# Altium PCB RPIDCA.PcbDoc
Units mil, origin at the board's own origin, x right, y up, seen from the top; angles counter-clockwise.
Board outline 2362.2 x 905.51 mil, 2 copper layers (Top Layer, Bottom Layer); 27 components, 26 nets, 110 pads, 20 vias.
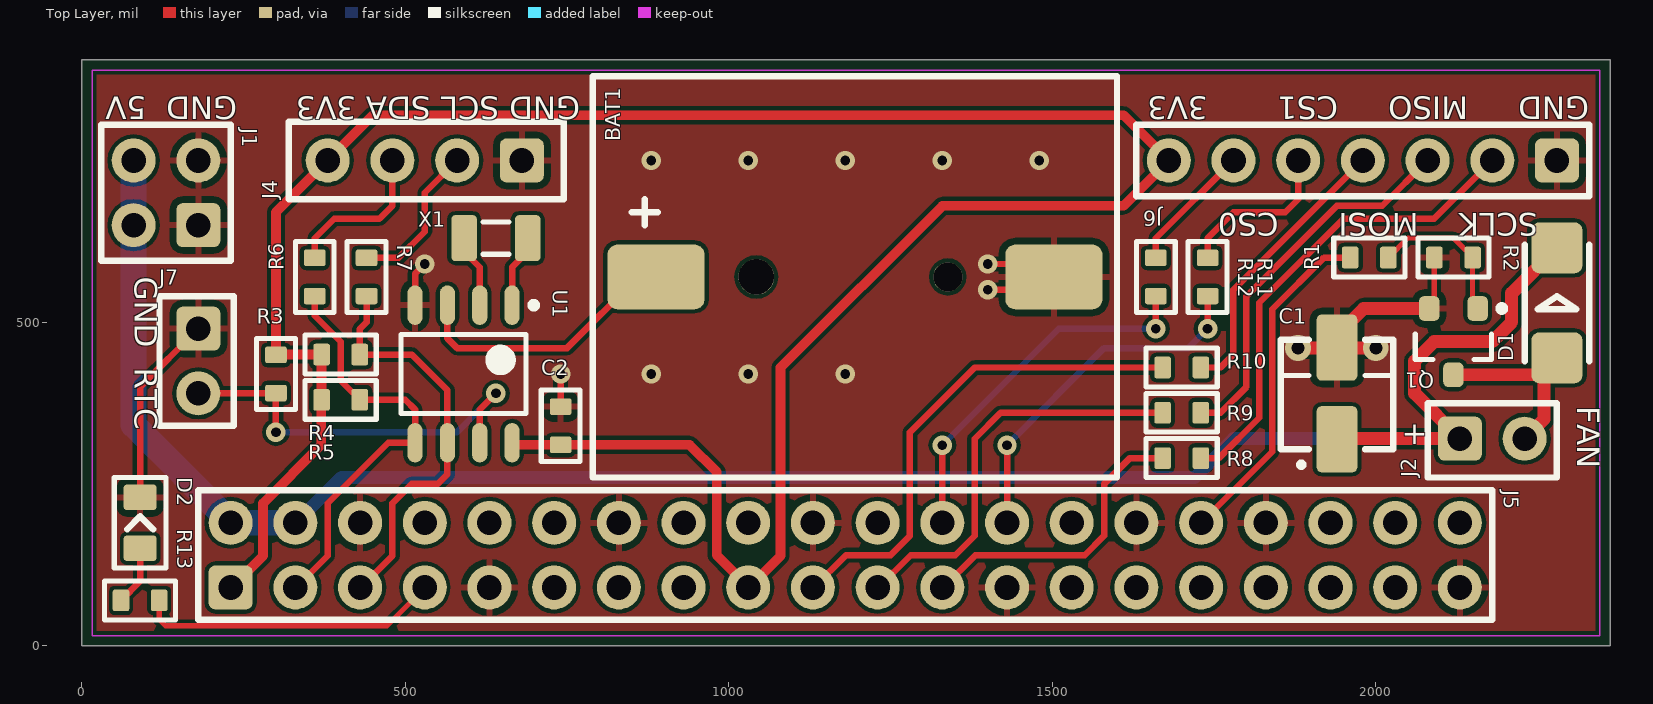
[diagram p0: Top Layer view]
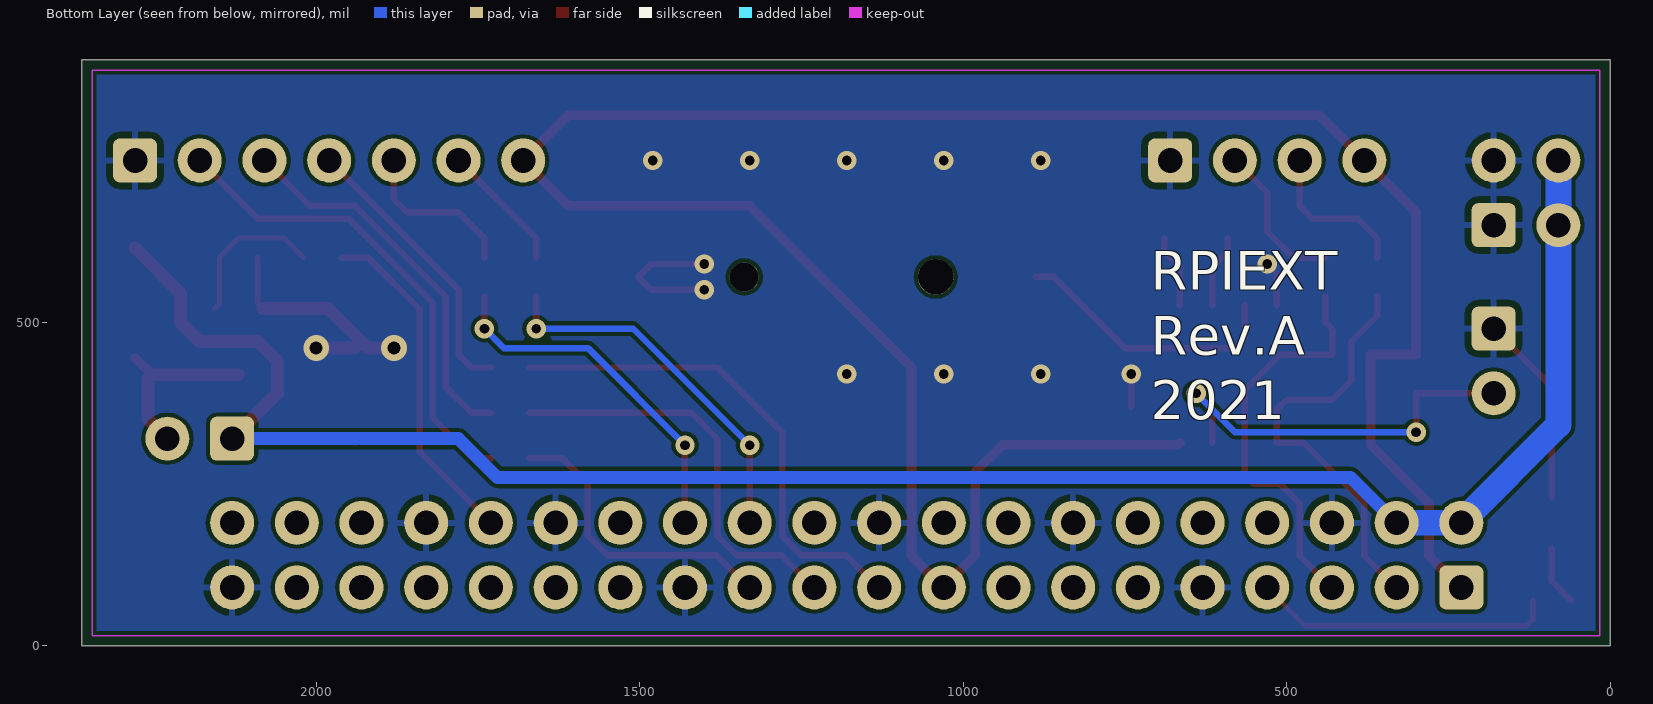
[diagram p1: Bottom Layer view, seen from below]
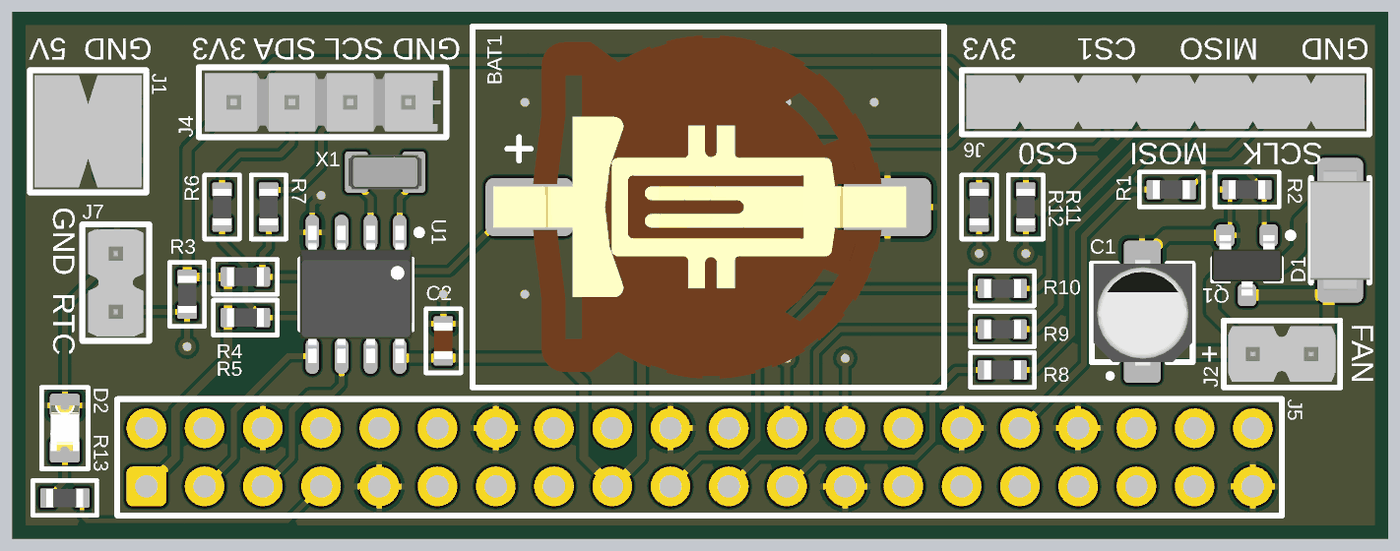
[diagram p2: 3D render of the assembled board from above, using the file's embedded part models]

## Layer stack, top to bottom
Top Solder: solder mask 0.4, Solder Resist, Dk 3.5
Top Layer: signal copper 1.4
Dielectric 1: dielectric 12.6, FR-4, Dk 4.8
Bottom Layer: signal copper 1.4
Bottom Solder: solder mask 0.4, Solder Resist, Dk 3.5

## Board outline
0,0 2362.2,0 2362.2,905.51 0,905.51

## Design rules (kind name [scope] priority, off if disabled: settings)
Clearance [All] p1: gap=6 ignorepadtopadclearanceinfootprint=FALSE
ComponentClearance [All] p1: gap=10 collisioncheckmode=3 verticalgap=10 showdistances=TRUE
HoleSize [All] p1: absolutevalues=TRUE maxlimit=100 minlimit=15 maxpercent=80.000 minpercent=20.000
PolygonConnect [All] p1: thpad.connectstyle=Relief thpad.reliefconductorwidth=10 thpad.reliefentries=4 thpad.polygonreliefangle="90 Angle" thpad.airgapwidth=10 smdpad.connectstyle=Relief smdpad.reliefconductorwidth=10 smdpad.reliefentries=4 smdpad.polygonreliefangle="90 Angle" smdpad.airgapwidth=10 via.connectstyle=Direct via.reliefconductorwidth=10 via.reliefentries=4 via.polygonreliefangle="90 Angle" via.airgapwidth=10
RoutingVias [All] p1: holewidth=15 width=50 viastyle="Through Hole" minholewidth=15 minwidth=50 maxholewidth=15 maxwidth=50
SolderMaskExpansion [All] p1: expansion=4
Width [All] p1: maxlimit=50 minlimit=6 preferedwidth=10
28 further rules are at their usual default settings.

## Components (designator, comment, footprint, x,y, rotation, side; value= is the part's Value field where it differs from the comment)
BAT1 "CR1220" BC501SM 1200,570 r180 top
C1 "10uF" C_EL_B_4MM_RF_M 1940,390 r90 top
C2 "0.1uF" 0603C_RF_M 740,340 r270 top
D1 "D" ONSEMI_DO214AC_RF_M 2280,530 r270 top
D2 "Unspecified" 0805LED_RF_M 90,190 r270 top
J1 "DCIN" HEADER-2.54-4P-2R 180,650 r180 top
J2 "FAN" HEADER-2.54-2P1 2130,320 r0 top
J4 "I2C" HEADER-2.54-4P1 680,750 r180 top
J5 "RPI4-40P" HEADER-2.54-RCPT-40P-2R-BTL 230,90 r0 top
J6 "PINHDR-7P1" HEADER-2.54-7P1 2280,750 r180 top
J7 "RTCINT" HEADER-2.54-2P1 180,490 r270 top
Q1 "IRLML2502" IRLML_SOT-23 2120,470 r270 top
R1 "1K" 0603R_RF_M 1990,600 r0 top
R2 "33K" 0603R_RF_M 2120,600 r180 top
R3 "10K" 0603R_RF_M 300,420 r90 top
R4 "10K" 0603R_RF_M 400,450 r180 top
R5 "10K" 0603R_RF_M 400,380 r180 top
R6 "100R" 0603R_RF_M 360,570 r270 top
R7 "100R" 0603R_RF_M 440,570 r270 top
R8 "100R" 0603R_RF_M 1700,290 r180 top
R9 "100R" 0603R_RF_M 1700,360 r180 top
R10 "100R" 0603R_RF_M 1700,430 r180 top
R11 "100R" 0603R_RF_M 1740,570 r270 top
R12 "100R" 0603R_RF_M 1660,570 r270 top
R13 "1K" 0603R_RF_M 90,70 r180 top
U1 "M41T81SM6F" ST_SOIC-8 590,420 r270 top
X1 "32.786 kHz" XTAL_3215 640,630 r180 top

## Footprints (in the part's own frame and the unit in brackets; to place one, negate y for a bottom-side part, rotate by r counter-clockwise, add the part's x,y. Pads: shape width x height; smd on the part's side, far side on the other; paste and mask are expansions set on the pad)
0603C_RF_M [mm] "Chip Capacitor 0603 Reflow Medium"
  rrect25% 0.65x0.85 smd: 1(-0.75,0) 2(0.75,0)
  silkscreen extent -1.4,-0.76 1.4,0.76, body extent -0.8,-0.4 0.8,0.41, height 0.9
0603R_RF_M [mm] "Chip Resistor 0603 Reflow Medium"
  rrect25% 0.65x0.85 smd: 1(-0.75,0) 2(0.75,0)
  silkscreen extent -1.4,-0.76 1.4,0.76, body extent -0.8,-0.4 0.8,0.4, height 0.55
0805LED_RF_M [mm] "Chip LED 0805 Reflow Medium"
  rrect25% 1x1.3 smd: A(1,0) C(-1,0)
  silkscreen extent -1.78,-1.02 1.78,1.02, body extent -1,-0.62 1,0.63, height 0.7
BC501SM [mil] "BATTERY HOLDER COIN 12MM SMD"
  round 45 hole 45 unplated mask-50: M1(-138.49,0.01)
  round 55 hole 55 unplated mask-60: M2(157.51,0.01)
  rrect30% 150x100 smd: N(-302.49,0.01) P(312.51,0.01)
  silkscreen extent -400,-310 410,310, body extent -335,-295 374,295, height 162
C_EL_B_4MM_RF_M [mm] "Electrolytic Capacitor SMD Size B 4mm OD"
  rrect25% 2.6x1.6 smd: N(1.8,0) P(-1.8,0)
  silkscreen extent -2.88,-2.2 2.1,2.2, body extent -2.35,-2.17 2.25,2.13, height 3.91
HEADER-2.54-2P1 [mil] "Pin Header Single Row 2 Positions Pitch 2.54 mm"
  rrect30% 68x68 hole 38: 1(0,0)
  round 68 hole 38: 2(100,0)
  silkscreen extent -50,-60 150,55, body extent -42,-50 142,45, height 331
HEADER-2.54-4P1 [mil] "Pin Header Single Row 4 Positions Pitch 2.54 mm"
  rrect30% 68x68 hole 38: 1(0,0)
  round 68 hole 38: 2(100,0) 3(200,0) 4(300,0)
  silkscreen extent -65,-60 360,60, body extent -55,-50 350,50, height 332
HEADER-2.54-4P-2R [mil] "Rectangular Header Male Pins Double Row 4 Positions Pitch 2.54 mm"
  rrect30% 68x68 hole 38: 1(0,0)
  round 68 hole 38: 2(100,0) 3(0,-100) 4(100,-100)
  silkscreen extent -50,-155 150,55, body extent -42,-146 142,46, height 322
HEADER-2.54-7P1 [mil] "Pin Header Single Row 7 Positions Pitch 2.54 mm"
  rrect30% 68x68 hole 38: 1(0,0)
  round 68 hole 38: 2(100,0) 3(200,0) 4(300,0) 5(400,0) 6(500,0) 7(600,0)
  silkscreen extent -50,-55 650,55, body extent -42,-46 642,46, height 321
HEADER-2.54-RCPT-40P-2R-BTL [mil] "40 Position Receptacle, Bottom or Top Entry Connector 0.100\" (2.54mm) Through Hole Gold Reverse"
  rrect30% 68x68 hole 38: 1(0,0)
  round 68 hole 38: 2(0,100) 3(100,0) 4(100,100) 5(200,0) 6(200,100) 7(300,0) 8(300,100) 9(400,0) 10(400,100) 11(500,0) 12(500,100) 13(600,0) 14(600,100) 15(700,0) 16(700,100) 17(800,0) 18(800,100) 19(900,0) 20(900,100) 21(1000,0) 22(1000,100) 23(1100,0) 24(1100,100) 25(1200,0) 26(1200,100) 27(1300,0) 28(1300,100) 29(1400,0) 30(1400,100) 31(1500,0) 32(1500,100) 33(1600,0) 34(1600,100) 35(1700,0) 36(1700,100) 37(1800,0) 38(1800,100) 39(1900,0) 40(1900,100)
  silkscreen extent -50,-50 1950,150, body extent -50,-49 1950,149, height 108
IRLML_SOT-23 [mm] "Infineon's IRLML Series Logic-Level Transistor SOT-23"
  rrect50% 0.97x0.8 smd: 1(-1.3,0.95) 2(-1.3,-0.95) 3(1.3,0)
  silkscreen extent -1.42,-1.5 0.7,2.03, body extent -1.32,-1.52 1.32,1.52, height 1.12
ONSEMI_DO214AC_RF_M [mm]
  rrect30% 2x2 smd: A(2.159,0) C(-2.159,0)
  silkscreen extent -2.29,-1.27 2.29,1.27, body extent -2.61,-1.3 2.61,1.3, height 2.3
ST_SOIC-8 [mm]
  oval 1.55x0.6 smd: 1(-2.7,1.905) 2(-2.7,0.635) 3(-2.7,-0.635) 4(-2.7,-1.905) 5(2.7,-1.905) 6(2.7,-0.635) 7(2.7,0.635) 8(2.7,1.905)
  silkscreen extent -2.82,-2.45 1.55,2.88, body extent -3,-2.45 3,2.45, height 1.75
XTAL_3215 [mm] "Crystal SMD 3.2x1.5mm 2-Flat Leads"
  rrect30% 1x1.8 smd: 1(-1.25,0) 2(1.25,0)
  silkscreen extent -0.51,-0.64 0.51,0.64, body extent -1.6,-0.75 1.6,0.75, height 0.9

## Part data
BAT1: library part BC501SM, "Single Cell Battery", Nominal Voltage=3V, Supplier Part No=BC501SM-ND, Mounting Technology=SMT, Suitable Battery=CR1220, Supplier=DigiKey, Supplier Link=https://www.digikey.com/en/products/detail/mpd-memory-protection-devices/BC501SM/2439260
C1: library part C-P, "Polarized Capacitor", Manufacturer="Generic Brand", Max Voltage="? V", Tolerance=?, Category=Capacitor, Mounting Technology=SMT, Supplier Link=http://
C2: library part C, "Capacitor", Manufacturer="Generic Brand", Max Voltage=10V, Tolerance=20%, Category=Capacitor, Mounting Technology=SMT, Supplier Link=http://
D1: "Diode (Rectifier)", Manufacturer="Generic Brand", Max Forward Voltage="? V", Power Rating="? W", Category=Diode, Mounting Technology=SMT, Supplier Link=http://
D2: library part LED, "LED", Forward Voltage Drop="? V", Manufacturer="Generic Brand", Category=Diode, Emitting Color=Unspecified, Mounting Technology=SMT, Supplier Link=http://
J1: library part PINHDR-4P-2R, "Rectangular Header Male Pins Double Row 4 Positions", Mounting Technology=THT
J2 J7: library part PINHDR-2P1, "Pin Header Single Row 2 Positions", Mounting Technology=THT
J4: library part PINHDR-4P1, "Generic Pin Header 4x1"
J5: "Raspberry Pi 4 Model B+ Compatible GPIO Header"
J6: "Pin Header Single Row 7 Positions", Mounting Technology=THT
Q1: "MOSFET N-CH 20V 4.2A SOT23", Alternative Supplier Part No=517112745, Manufacturer=Infineon, Manufacturer Part No=IRLML2502TRPBF, Package=SOT-23, Supplier Part No=IRLML2502TRPBFCT-ND, Alternative Supplier=Chipdip, Alternative Supplier Link=https://www.chipdip.by/product/irlml2502tr, Mounting Technology=SMT, Supplier=DigiKey, Supplier Link=https://www.digikey.com/en/products/detail/infineon-technologies/IRLML2502TRPBF/811439
R1 R2 R3 R4 R5 R6 R7 R8 R9 R10 R11 R12 R13: library part R, "Resistor", Manufacturer="Generic Brand", Max Voltage="? V", Power Rating="? W", Tolerance=?, Category=Resistor, Mounting Technology=SMT, Supplier Link=http://
U1: "IC RTC CLK/CALENDAR I2C 8-SOIC", Alternative Supplier Part No=9000354105, Manufacturer=STMicroelectronics, Package=SOIC-8, Supplier Part No=497-4684-1-ND, Alternative Supplier=Chipdip, Alternative Supplier Link=https://www.chipdip.by/product/m41t81sm6f, Detailed Description="Real Time Clock (RTC) IC Clock/Calendar - I?C, 2-Wire Serial 8-SOIC (0.154\", 3.90mm Width)", Manufacturer Part No=M41T81SM6F, Mounting Technology=SMT, Supplier=DigiKey, Supplier Link=https://www.digikey.com/en/products/detail/stmicroelectronics/M41T81SM6F/865103, VCC="2.7V ~ 5.5V"
X1: library part XT-2P, "Crystal Resonator (2 Leads)", Manufacturer="Generic Brand", Tolerance="? ppm", Category=Crystal, Mounting Technology=SMT, Supplier Link=http://

## Via types
v1: diameter 30, hole 15, Top Layer to Bottom Layer, tented both sides, 18 vias
v2: diameter 40, hole 20, Top Layer to Bottom Layer, tented both sides, 2 vias

## Nets (pads, with @x,y where several pads share a name; then routed paths per layer and width w, separated by ;. In a path a pad name is that pad's centre, name@x,y a point inside that pad or via, vN(x,y) a via of type N, cw(c..) or ccw(c..) an arc to the next point about the centre after c; other vN are vias at no path point)
3V3: C2.2 J4.4 J5.1 J5.17 J6.7 R3.2 R4.2 R5.2 U1.8 | length 3807.7
  Top Layer w15: J5.1@230.55,89.45 280,138.9 280,220 370,310 370,379.53 R5.2 R4.2 R3.2@300,450 ; R3.2 R3.2@300,450 ; U1.8 668.23,310.47 C2.2 939.53,310.47 981.1,268.9 981.1,140 1031.1,90 1080,138.9 1080,430 1330,680 1610,680 J6.7 1610,820 450,820 J4.4 300,670 R3.2@300,450
5V: C1.P D1.C J1.2 J1.4 J2.1 J5.2 J5.4 | length 3234.8
  Top Layer w20: C1.P@1939.13,320 C1.P 1940.87,320 J2.1 2060,390 2060,440 2090,470 2180,470 2210,500 2210,545 D1.C
  Bottom Layer w20: J5.4@331.1,190 401.1,260 1720,260 1780,320 J2.1
  Bottom Layer w40: J1.4 J1.2 80,341.1 231.1,190 J5.4 J5.4@331.1,190
CS0: J5.24 R12.2 | length 575.5
  Top Layer w10: v1(1330,310) 1330,191.1 J5.24@1331.1,190 ; v1(1660,490) R12.2
  Bottom Layer w10: v1(1330,310) 1510,490 v1(1660,490)
CS1: J5.26 R11.2 | length 555.5
  Top Layer w10: v1(1430,310) 1430,191.1 J5.26@1431.1,190 ; v1(1740,490) R11.2
  Bottom Layer w10: v1(1430,310) 1580,460 1710,460 v1(1740,490)
FAN_EN: J5.32 R1.1 | length 529.2
  Top Layer w10: J5.32 1840,300 1840,520 1920,600 R1.1
GND: BAT1.N C1.N C2.1 D2.C J1.1 J1.3 J4.1 J5.6 J5.9 J5.14 J5.20 J5.25 J5.30 J5.34 J5.39 J6.1 J7.1 Q1.2 R2.2 U1.4 | length 1009.9
  Top Layer w8: Q1.2 2090.47,529.05 R2.2
  Top Layer w10: D2.C 90,400 J7.1 ; U1.4 515,575 v1(530,590) ; C2.1 v1(740,420) ; v1(1400,550) 1482.5,550 BAT1.N 1482.47,590 v1(1400,590)
  Top Layer w20: v2(1880,460) 1920,460 1981.18,521.18 Q1.2 ; C1.N@1940,460 v2(2000,460)
  other v1: 880,420 1030,420 1180,420 880,750 1030,750 1180,750 1330,750 1480,750
LED: J5.7 R13.1 | length 468.9
  Top Layer w8: R13.1 119.53,40.47 129.25,30.75 471.85,30.75 J5.7@530.55,89.45
MISO: J5.21 R9.2 | length 639.9
  Top Layer w10: J5.21@1230.55,89.45 1281.1,140 1350,140 1380,170 1380,320 1420,360 R9.2
MOSI: J5.19 R10.2 | length 774.7
  Top Layer w10: J5.19@1130.55,89.45 1181.1,140 1250,140 1280,170 1280,330 1380,430 R10.2
NetBAT1_P: BAT1.P U1.3 | length 425.6
  Top Layer w10: U1.3 565,475 580,460 750,460 859.99,569.99 BAT1.P
NetD1_A: D1.A J2.2 Q1.3 | length 284.7
  Top Layer w15: D1.A@2253.82,418.82 D1.A
  Top Layer w20: Q1.3 2253.82,418.82 2260,412.64 2260,350 J2.2
NetD2_A: D2.A R13.2 | length 92.9
  Top Layer w10: R13.2 90,99.53 D2.A
NetJ4_2: J4.2 R7.1 | length 237.5
  Top Layer w10: R7.1 489.53,599.53 530,640 530,700 J4.2
NetJ4_3: J4.3 R6.1 | length 241.2
  Top Layer w10: R6.1 360,630 390,660 460,660 480,680 J4.3
NetJ6_2: J6.2 R8.1 | length 745
  Top Layer w10: R8.1 1757.57,290 1820,352.43 1820,530 1950,660 2090,660 J6.2
NetJ6_3: J6.3 R9.1 | length 594
  Top Layer w10: R9.1 1760,360 1800,400 1800,540 1940,680 2010,680 J6.3
NetJ6_4: J6.4 R10.1 | length 441.6
  Top Layer w10: R10.1 1760,430 1780,450 1780,550 J6.4
NetJ6_5: J6.5 R11.1 | length 255.3
  Top Layer w10: R11.1 1740,630 1780,670 1860,670 1880,690 J6.5
NetJ6_6: J6.6 R12.1 | length 200.2
  Top Layer w10: R12.1 1660,630 J6.6
NetQ1_1: Q1.1 R1.2 R2.1 | length 237.2
  Top Layer w8: R1.2 2049.53,630 2120,630 2149.53,600.47 R2.1 2149.53,529.06 Q1.1
NetU1_1: U1.1 X1.1 | length 113.7
  Top Layer w10: U1.1 665,585 689.21,609.21 X1.1
NetU1_2: U1.2 X1.2 | length 113.7
  Top Layer w10: X1.2 590.79,609.21 615,585 U1.2
RTC_INT: J7.2 R3.1 U1.7 | length 632.2
  Top Layer w10: J7.2 299.53,390 R3.1 v1(300,330) ; U1.7 615,365 v1(640,390)
  Bottom Layer w10: v1(300,330) 580,330 v1(640,390)
SCL: J5.5 R4.1 R7.2 U1.6 | length 637.7
  Top Layer w10: J5.5@430.55,89.45 480,138.9 480,220 510,250 550,250 565,265 U1.6 565,395 510,450 R4.1 429.53,489.53 440,500 R7.2
SCLK: J5.23 R8.2 | length 469.9
  Top Layer w10: J5.23@1330.55,89.45 1381.1,140 1550,140 1580,170 1580,250 1620,290 R8.2
SDA: J5.3 R5.1 R6.2 U1.5 | length 657.1
  Top Layer w10: J5.3@330.55,89.45 380,138.9 380,220 473.7,313.7 U1.5 515,365 500,380 R5.1 400,409.53 400,470 360,510 R6.2
pads on no net: BAT1.M1 BAT1.M2 J5.8 J5.10 J5.11 J5.12 J5.13 J5.15 J5.16 J5.18 J5.22 J5.27 J5.28 J5.29 J5.31 J5.33 J5.35 J5.36 J5.37 J5.38 J5.40

## Polygon pours and split planes (outlines as drawn)
GND on Bottom Layer "GND_L02_P000" (solid, remove dead copper, pour order 0): 19.68,885.83 2342.52,885.83 2342.52,19.68 19.68,19.68
GND on Top Layer "Top Layer GND" (solid, remove dead copper, pour order 2): 15.75,889.76 2346.46,889.76 2346.46,15.75 15.75,15.75

## Keep-outs
Keep-Out Layer:
  lines w2: 15.75,15.75 15.75,889.76 2346.46,889.76 2346.46,15.75 15.75,15.75

## Silkscreen, mask and mechanical layers (free items; w line width, h text height)
Top Overlay:
  text "GND  5V" at 240,860 h60 r180
  text "GND SCL SDA 3V3" at 770,860 h60 r180
  text "GND     MISO     CS1       3V3" at 2330,860 h60 r180
  text "SCLK    MOSI      CS0" at 2250,680 h60 r180
  text "GND  RTC" at 70,570 h60 r270
  text "FAN" at 2300,370 h60 r270
  text "+" at 2040,300 h60
Bottom Overlay:
  text "RPIEXT" at 710,550 h60
  text "Rev.A" at 710,450 h60
  text "2021" at 710,350 h60
Mechanical 1:
  the board outline again, w10